# Altium PCB PCB1.PcbDoc
Units mm, origin at the board's own origin, x right, y up, seen from the top; angles counter-clockwise.
Board outline 88.49 x 113.16 mm, 2 copper layers (Top Layer, Bottom Layer); 100 components, 71 nets, 349 pads, 0 vias.
Unrouted connection lines stored in the file: 230.
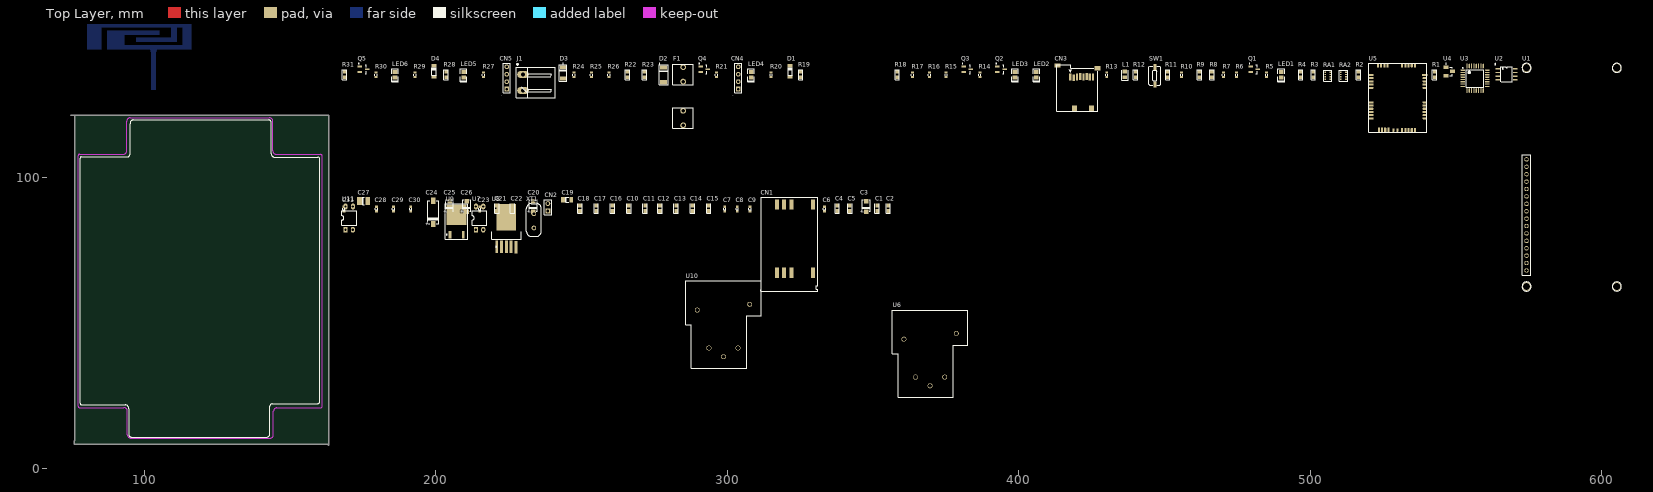
[diagram p0: Top Layer view]
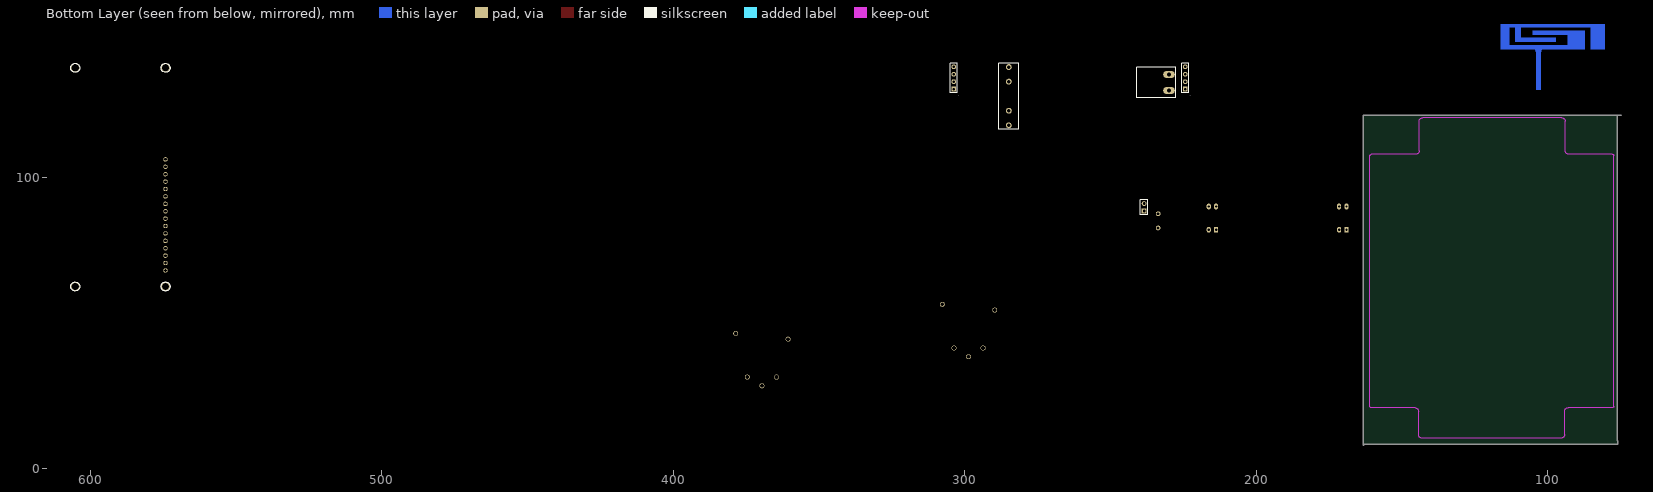
[diagram p1: Bottom Layer view, seen from below]

## Layer stack, top to bottom
Top Layer: signal copper 0.0356
Dielectric: dielectric 0.32, FR-4, Dk 4.8
Bottom Layer: signal copper 0.0356

## Board outline
95.707,121.133 74.803,121.133 76.2,121.133 76.2,10.744 76.2,9.703 76.073,9.576 76.073,8.357 162.916,8.357 163.297,7.976 163.297,17.755 163.297,121.133 95.834,121.133

## Design rules (kind name [scope] priority, off if disabled: settings)
Clearance [All] p1: gap=0.254
PolygonConnect [All] p1: connectstyle=Relief reliefconductorwidth=0.254 reliefentries=4 polygonreliefangle="90 Angle"
RoutingVias [All] p1: holewidth=0.711 width=1.27 viastyle="Through Hole" minholewidth=0.711 minwidth=1.27 maxholewidth=0.711 maxwidth=1.27
SilkscreenOverComponentPads [IsPad] p1: minsilkscreentomaskgap=0.254
SolderMaskExpansion [All] p1: expansion=0.102
Width "Schematic Width Constraint_1" [InNet('V_OUT')] p1: maxlimit=2.286 minlimit=2.032 preferedwidth=2.286
Width "Schematic Width Constraint" [InNet('RL_NO0')] p2: maxlimit=2.286 minlimit=2.032 preferedwidth=2.286
Width [All] p3: maxlimit=0.762 minlimit=0.254 preferedwidth=0.254
27 further rules are at their usual default settings.

## Components (designator, comment, footprint, x,y, rotation, side; value= is the part's Value field where it differs from the comment)
C1 "10p" C2012-0805 351.46,89.281 r90 top
C2 "33p" C2012-0805 355.27,89.281 r90 top
C3 "10uF" "Cap SMD Tant 10u" 347.675,89.865 r90 top
C4 "10p" C2012-0805 337.795,89.281 r90 top
C5 "33p" C2012-0805 342.113,89.281 r90 top
C6 "104" C1608-0603 333.375,89.052 r90 top
C7 "33pF" C1608-0603 299.187,89.052 r90 top
C8 "33pF" C1608-0603 303.505,89.052 r90 top
C9 "33pF" C1608-0603 307.848,89.052 r90 top
C10 "104" C2012-0805 266.268,89.281 r90 top
C11 "104" C2012-0805 271.856,89.281 r90 top
C12 "104" C2012-0805 276.936,89.281 r90 top
C13 "104" C2012-0805 282.524,89.281 r90 top
C14 "104" C2012-0805 288.112,89.281 r90 top
C15 "104" C2012-0805 293.7,89.281 r90 top
C16 "22P" C2012-0805 260.68,89.281 r90 top
C17 "22P" C2012-0805 255.092,89.281 r90 top
C18 "104" C2012-0805 249.504,89.281 r90 top
C19 "2.2uF" C1206 243.713,92.227 r0 top
C20 "10uF" "Cap SMD Tant 10u" 233.477,89.865 r90 top
C21 "104" C2012-0805 221.056,89.281 r90 top
C22 "104" C2012-0805 226.39,89.281 r90 top
C23 "104" C1608-0603 215.113,89.052 r90 top
C24 "10uF" "Cap SMD Tant - 470u" 199.111,87.884 r90 top
C25 "10uF" "Cap SMD Tant 10u" 204.775,89.865 r90 top
C26 "10uF" "Cap SMD Tant 10u" 210.617,89.865 r90 top
C27 "104" C1210 173.888,91.77 r0 top
C28 "104" C1608-0603 179.73,89.052 r90 top
C29 "104" C1608-0603 185.572,89.052 r90 top
C30 "104" C1608-0603 191.44,89.052 r90 top
C31 "104" C1608-0603 168.504,89.052 r90 top
CN1 "Sim Card Holder" "Sim card holder 1" 317.043,90.576 r90 top
CN2 "HDR1x2" CON.HDR1X2 238.531,88.367 r90 top
CN3 "SD Card/MMC" mini_SDCard 418.948,134.264 r0 top
CN4 "HDR1x4" CON.HDR1X4 303.809,130.175 r90 top
CN5 "HDR1x4" CON.HDR1X4 224.409,130.175 r90 top
D1 "1N4148" SOD80 321.615,136.246 r90 top
D2 "1N4007" DO-214AA,SMB 278.206,132.563 r90 top
D3 "Zener" D1208 243.688,133.833 r90 top
D4 "1N4148" SOD80 199.441,136.246 r90 top
F1 "FUSE" "Fuse 1" 284.912,117.729 r90 top
J1 "Domino2" "Domino 2 - Thao roi" 229.972,129.692 r0 top
L1 "100uH" L2012-0805 436.474,135.204 r90 top
LED1 "LED" LED.SMD0805 490.093,135.103 r90 top
LED2 "LED" LED.SMD0805 406.121,135.103 r90 top
LED3 "LED" LED.SMD0805 398.755,135.103 r90 top
LED4 "LED" LED.SMD0805 308.229,135.103 r90 top
LED5 "LED" LED.SMD0805 209.601,135.103 r90 top
LED6 "LED" LED.SMD0805 186.055,135.103 r90 top
Q1 "C1815" "SOT23 [C1815]" 481.101,137.008 r0 top
Q2 "C1815" "SOT23 [C1815]" 394.259,137.008 r0 top
Q3 "C1815" "SOT23 [C1815]" 382.702,137.008 r0 top
Q4 "C1815" "SOT23 [C1815]" 292.379,137.008 r0 top
Q5 "C1815" "SOT23 [C1815]" 175.539,137.008 r0 top
R1 "Value" R2012-0805 542.722,135.153 r90 top
R2 "Value" R2012-0805 516.611,135.153 r90 top
R3 "Value" R2012-0805 501.117,135.153 r90 top
R4 "Value" R2012-0805 496.799,135.153 r90 top
R5 "1k" R1608-0603 485.115,135.077 r90 top
R6 "1k" R1608-0603 474.828,135.077 r90 top
R7 "10k" R1608-0603 470.332,135.077 r90 top
R8 "0" R2012-0805 466.369,135.153 r90 top
R9 "10k" R2012-0805 462.051,135.153 r90 top
R10 "1k" R1608-0603 455.955,135.077 r90 top
R11 "1k" R2012-0805 451.206,135.153 r90 top
R12 "100k" R2012-0805 440.157,135.153 r90 top
R13 "1k" R1608-0603 430.251,135.077 r90 top
R14 "1k" R1608-0603 386.715,135.077 r90 top
R15 "1k" R1608-0603 375.158,135.077 r90 top
R16 "1k" R1608-0603 369.418,135.077 r90 top
R17 "1k" R1608-0603 363.652,135.077 r90 top
R18 "1k" R2012-0805 358.394,135.153 r90 top
R19 "1k" R2012-0805 325.272,135.153 r90 top
R20 "10k" R1608-0603 315.112,135.077 r90 top
R21 "10k" R1608-0603 296.393,135.077 r90 top
R22 "220" R2012-0805 265.811,135.153 r90 top
R23 "1k" R2012-0805 271.653,135.153 r90 top
R24 "120k" R1608-0603 247.447,135.077 r90 top
R25 "1k" R1608-0603 253.441,135.077 r90 top
R26 "1k" R1608-0603 259.461,135.077 r90 top
R27 "51K" R1608-0603 216.459,135.077 r90 top
R28 "1k" R2012-0805 203.606,135.153 r90 top
R29 "10k" R1608-0603 192.913,135.077 r90 top
R30 "10k" R1608-0603 179.553,135.077 r90 top
R31 "220" R2012-0805 168.758,135.153 r90 top
RA1 "10,100,1K,10K" Res_Array_Chip 506.959,133.553 r90 top
RA2 "10,100,1K,10K" Res_Array_Chip 512.318,133.553 r90 top
SW1 "PTS635" TactSwitches.PTS635.SMT 446.735,134.798 r90 top
U1 "LCD.LCD16x2" "LCD connector" 574.269,67.945 r90 top
U2 "24C04" SOIC8 564.413,137.135 r0 top
U3 "STM32F030K6T6" QFP80P900X900X245-32N 556.616,133.883 r0 top
U4 "ANTEN" SOT150P320X110-3N 547.751,136.246 r0 top
U5 "M95" QFN50P400X400X80_HS-15N 520.141,115.418 r0 top
U6 "RELAY_OMRON_4PIN" PCBComponent_1 356.641,24.359 r0 top
U7 "PC817" DIP4 213.792,81.89 r90 top
U8 "MIC29302" DPAK165P1524X238-5N 218.948,73.736 r0 top
U9 "LM1117-3.3V" TO-252 207.162,80.061 r0 top
U10 "RELAY_OMRON_4PIN" PCBComponent_1 285.75,34.341 r0 top
U11 "PC817" DIP4 169.062,81.89 r90 top
XT1 "8MHz" Crystal.HC49/USxx 233.705,87.401 r0 top

## Footprints (in the part's own frame and the unit in brackets; to place one, negate y for a bottom-side part, rotate by r counter-clockwise, add the part's x,y. Pads: shape width x height; smd on the part's side, far side on the other; paste and mask are expansions set on the pad)
C1206 [mm] "Chip Capacitor; Body 3.2 x 1.6 mm (LxW typ)"
  rect 1.27x1.8 smd: 1(0,0) 2(2.8,0)
  silkscreen extent 0.87,-0.81 1.9,0.8
C1210 [mm] "Chip Capacitor; Body 3.2 x 2.5 mm (LxW typ)"
  rect 1.6x2.7 smd: 1(0,0) 2(2.8,0)
  silkscreen extent 1.1,-1.25 1.7,1.25
C1608-0603 [mil] "Capacitor Chip 0603 package"
  rect 30x38 smd: 1(-30,0.06) 2(30,0.06)
  silkscreen extent -11,-15 10,15, body extent -28,-17 28,17, height 32
C2012-0805 [mm] "Capacitor Chip 0805 package"
  rect 1.3x1.27 smd: 1(-0.945,-0.007) 2(0.955,-0.007)
  silkscreen extent -1.7,-0.76 1.51,0.75, body extent -0.89,-0.58 0.89,0.58, height 0.79
"Cap SMD Tant 10u" [mm] "CAP TANT 10UF 16V 10% 1210"
  rect 1.5x1.55 smd: 1(-1.8,0) 2(1.8,0)
  silkscreen extent -1.7,-1.4 2.3,1.37, body extent -2.4,-0.91 2.4,0.89, height 1.8
"Cap SMD Tant - 470u" [mm] "CAP TANT 10UF 50V 10% 2917"
  rect 2.2x1.55 smd: 1(-4,0) 2(4,0)
  silkscreen extent -3.91,-1.93 3.96,1.91, body extent -3.76,-1.78 3.84,1.73, height 2.79
CON.HDR1X2 [mil]
  rect 64x64 hole 35.43: 1(-0.44,0.28)
  round 64 hole 35.43: 2(99.56,0.28)
  silkscreen extent -51,-50 150,50, body extent -51,-50 149,50, height 350
CON.HDR1X4 [mil]
  rect 64x64 hole 35.43: 1(0,0)
  round 64 hole 35.43: 2(100,0) 3(200,0) 4(300,0)
  silkscreen extent -50,-50 350,50, body extent -50,-50 350,50, height 350
Crystal.HC49/USxx [mm] "HC49USxx package"
  rrect100% 1.6x1.6 hole 1: 1(0,0) 2(0,-4.877)
  silkscreen extent -2.55,-7.8 2.55,3.5, body extent -2.29,-7.57 2.3,3.25, height 5.08
D1208 [mil]
  rect 50x80 smd: 1(0,0) 2(150,0)
  silkscreen extent -35,-50 205,50
DIP4 [mm]
  rect 2x1.4 hole 0.8: 1(0,0)
  oval 2x1.4 hole 0.8: 2(0,-2.54) 3(8,-2.54) 4(8,0)
  silkscreen extent 1.48,-3.78 6.57,1.3, body extent -0.17,-3.72 8.19,1.34, height 5.4
DO-214AA,SMB [mm]
  rect 1.5x2.3 smd: 1(0,0) 2(5,0)
  silkscreen extent -0.95,-1.6 6.48,1.57, body extent -0.19,-1.78 5.21,1.82, height 2.3
"Domino 2 - Thao roi" [mm]
  oval 4x2.5 hole 1.5: 1(0,5.5) 2(0,0)
  silkscreen extent -2.25,-2.5 11.03,9.2, body extent -1.09,-2.54 11.07,8, height 9
DPAK165P1524X238-5N [mm] "D2-PAK, 5-Pads, Body 8.43x8.39mm (max), IPC Medium Density"
  rect 1x4.2 smd: 1(2,2.336) 2(3.65,2.336) 3(5.3,2.336) 4(6.95,2.336) 5(8.6,2.209)
  rect 6.7x9.1 smd: 3(5.334,12.436)
  silkscreen extent 0.28,2.21 10.38,7.49, body extent 0.31,4.24 10.36,14.91, height 2.38
"Fuse 1" [mm]
  round 2 hole 1.2: 1(0,0) 1(5,0) 2(15,0) 2(20,0)
  silkscreen extent -1,-3.52 21,3.52, body extent -0.03,-2.58 20.03,2.58, height 8
L2012-0805 [mm] "Inductor Chip 0805 package"
  rect 1.3x1.5 smd: 1(-0.945,-0.007) 2(0.955,-0.007)
  silkscreen extent -1.99,-1.16 1.51,1.14, body extent -0.89,-0.58 0.89,0.58, height 0.79
"LCD connector" [mm] "Character LCD 16x2"
  round 1.5 hole 0.9: 1(0,0) 2(2.54,0) 3(5.08,0) 4(7.62,0) 5(10.16,0) 6(12.7,0) 7(15.24,0) 8(17.78,0) 9(20.32,0) 10(22.86,0) 11(25.4,0) 12(27.94,0) 13(30.48,0) 14(33.02,0) 15(35.56,0) 16(38.1,0)
  round 3 hole 2.5 unplated: M1(-5.5,0) M2(69.5,0) M3(-5.5,-31) M4(69.5,-31)
  silkscreen extent -7.09,-32.57 71.07,1.57, body extent -1.27,-1.32 39.37,1.22, height 5.5
LED.SMD0805 [mm]
  rect 1.3x1.6 smd: 1(0.948,0.006) 2(-0.952,0.006)
  silkscreen extent -2.44,-1.14 2,1.16, body extent -1.08,-0.64 1.08,0.64, height 1.14
mini_SDCard [mm]
  rect 0.8x2.4 smd paste+0.127 mask+0.127: 1(-1.21,0) 3(1.1,0) 4(2.2,0.2) 5(3.3,0) 6(4.4,0.2) 7(5.5,0) 8(6.6,0)
  rect 0.8x2.2 smd paste+0.127 mask+0.127: 2(0,-0.2)
  rect 2x1.4 smd paste+0.127 mask+0.127: 9(8.128,3.048) 10(-5.588,4.064)
  rect 1.8x2 smd paste+0.127 mask+0.127: 11(0.254,-10.668) 12(6.096,-10.668)
  silkscreen extent -5.84,-11.68 8.13,4.32, body extent -5.84,-11.63 8.01,4.52, height 1.68
PCBComponent_1 [mm]
  round 1.7 hole 1.3: 1(4,20) 2(18,7) 3(8,7) 4(22,22) 5(13,4)
  silkscreen extent 0,0 26,30
QFN50P400X400X80_HS-15N [mm] "QFN, 14-Leads, Body 4.00x4.00mm, Pitch 0.50mm, Thermal Pad 4.00x2.20mm, IPC Medium Density"
  rrect50% 1.8x0.7 smd: 1(0.7,19.6) 2(0.7,18.5) 3(0.7,17.4) 4(0.7,16.3) 5(0.7,15.2) 6(0.7,10.2) 7(0.7,9.1) 8(0.7,8) 9(0.7,6.9) 10(0.7,5.8) 11(0.7,4.7) 31(19.2,19.6)
  rrect50% 0.7x1.8 smd: 12(3.45,0.7) 13(4.55,0.7) 14(5.65,0.7) 15(6.75,0.7)
  rrect50% 0.7x1.4 smd: 16(11.45,0.7) 17(12.55,0.7) 18(13.65,0.7) 19(14.75,0.7) 20(15.85,0.7) 32(15.85,22.9) 33(14.75,22.9) 34(13.65,22.9) 35(12.55,22.9) 36(11.45,22.9) 37(6.45,22.9) 38(5.35,22.9) 39(4.25,22.9) 40(3.15,22.9)
  rrect50% 1.4x0.7 smd: 21(19.2,4.7) 22(19.2,5.8) 24(19.2,8) 25(19.2,9.1) 26(19.2,10.2) 27(19.2,15.2) 28(19.2,16.3) 29(19.2,17.4) 30(19.2,18.5) 223(19.2,6.9)
  rrect50% 0.7x1.2 smd: 41(8.45,0.7) 42(9.8,0.7)
  silkscreen extent 0,0 19.9,23.6
QFP80P900X900X245-32N [mm] "QFP, 32-Leads, Body 7.00x7.00mm, Pitch 0.80mm, IPC Medium Density"
  oval 1.6x0.45 smd: 1(-4.2,2.8) 2(-4.2,2) 3(-4.2,1.2) 4(-4.2,0.4) 5(-4.2,-0.4) 6(-4.2,-1.2) 7(-4.2,-2) 8(-4.2,-2.8) 17(4.2,-2.8) 18(4.2,-2) 19(4.2,-1.2) 20(4.2,-0.4) 21(4.2,0.4) 22(4.2,1.2) 23(4.2,2) 24(4.2,2.8)
  oval 0.45x1.6 smd: 9(-2.8,-4.2) 10(-2,-4.2) 11(-1.2,-4.2) 12(-0.4,-4.2) 13(0.4,-4.2) 14(1.2,-4.2) 15(2,-4.2) 16(2.8,-4.2) 25(2.8,4.2) 26(2,4.2) 27(1.2,4.2) 28(0.4,4.2) 29(-0.4,4.2) 30(-1.2,4.2) 31(-2,4.2) 32(-2.8,4.2)
  silkscreen extent -4.32,-3 3,3.7, body extent -3.5,-3.5 3.5,3.5, height 2.45
R1608-0603 [mil] "Resister Chip 0603 package"
  rect 30x39.37 smd: 1(-30,0.06) 2(30,0.06)
  silkscreen extent -11,-15 10,16, body extent -28,-17 28,17, height 12
R2012-0805 [mm] "Resister Chip 0805 package"
  rect 1.3x1.27 smd: 1(-0.945,-0.007) 2(0.955,-0.007)
  silkscreen extent -1.72,-0.73 1.73,0.75, body extent -0.89,-0.58 0.89,0.58, height 0.41
Res_Array_Chip [mil] "Res Array Chip 4xRes"
  rect 18x24 smd: 1(-2,0) 2(31.5,0) 3(62.99,0) 4(96,0) 5(96,70) 6(62.99,70) 7(31.5,70) 8(-2,70)
  silkscreen extent -26,-22 120,92, body extent -16,3 110,65, height 20
"Sim card holder 1" [mm]
  rect 3.5x1.4 smd: 1(0,0) 2(0,-2.54) 3(0,-5.08) 4(0,-12.4) 5(-23.4,0) 6(-23.4,-2.54) 7(-23.4,-5.08) 8(-23.4,-12.4)
  silkscreen extent -29.72,-14.07 2.54,5.59, body extent -28.21,-12.45 1.79,4.85, height 2.5
SOD80 [mm] "4148-SOD80 Diode, 2-Leads, Body 3.4x1.4mm, IPC Medium Density"
  rect 1.2x1.65 smd: 1(-1.905,0) 2(1.905,0)
  silkscreen extent -1.33,-0.76 1.27,0.72, body extent -2,-0.9 2,0.9, height 1.89
SOIC8 [mm]
  rect 1.5x0.5 smd: 1(0,0) 2(0,-1.27) 3(0,-2.54) 4(0,-3.81) 5(6,-3.81) 6(6,-2.54) 7(6,-1.27) 8(6,0)
  silkscreen extent -1.05,-4.5 4.9,1.82, body extent -0.08,-4.39 5.92,0.51, height 1.7
"SOT23 [C1815]" [mm] "SOT23, 3-Leads, Body 3.0x2.6mm (max), Pitch 0.95mm, IPC Medium Density"
  rect 1.55x0.6 smd: 1(-1.5,0.95) 2(-1.5,-0.95) 3(0.925,0)
  silkscreen extent -2.05,-1.5 0.7,2.02, body extent -1.53,-1.5 1.53,1.5, height 1.1
SOT150P320X110-3N [mm] "SOT23, 3-Leads, Body 3.00x3.20mm, Pitch 1.50mm, IPC Medium Density"
  rect 1.85x1.2 smd: 1(1.125,0) 2(-1.125,1.5) 3(-1.125,-1.5)
  silkscreen extent -1.25,-1.5 0.96,2.77, body extent -0.95,-1.5 0.96,1.5, height 1.1
TactSwitches.PTS635.SMT [mil] "3,5 mm Tact Switches, PTS635 Series"
  rect 79x39 smd: 1(-118,0) 2(118,0)
  silkscreen extent -128,-79 128,79, body extent -135,-70 135,70, height 100
TO-252 [mm]
  rect 1x2.54 smd: 1(-2.3,0.152) 3(2.3,0.152)
  rect 7x7 smd: 2(0,7)
  silkscreen extent -3.81,-1.4 3.81,10.79, body extent -3.24,-0.27 3.3,9.67, height 2.44

## Part data
C1 C2 C4 C5 C6 C7 C8 C9 C10 C11 C12 C13 C14 C15 C16 C17 C18 C19 C21 C22 C23 C27 C28 C29 C30 C31: library part Capacitor, "Cap, Ceramic Capacitor, 104, 10V"
C3 C20 C24 C25 C26: library part Cap_Pol, "Cap, Polizared Capacitor 10uF,16V"
CN2: "Conn, Header 1x2"
CN3: "MMC/SD Card"
CN4 CN5: "Conn, Header 1x4"
D1 D4: library part "Diode 1N4148", "Diode, Small signal 1N4148"
D2: library part "Diode 1N4007", "Diode, General Purpose Rectifier, 1Amp,1000V 1N4007"
D3: library part "Diode Zener", "Diode, Zener"
J1: "Conn, 2 pins Domino Header"
L1: library part Inductor, "Ind, 100uH, 20%"
LED1 LED2 LED3 LED4 LED5 LED6: "Led, Red, SMD0805"
Q1 Q2 Q3 Q4 Q5: "BJT, Audio Freq Amplifier NPN Transistor C1815"
R1 R2 R3 R4 R5 R6 R7 R8 R9 R10 R11 R13 R14 R15 R16 R17 R18 R19 R20 R21 R22 R23 R24 R25 R26 R27 R28 R29 R30 R31: library part Resistor, "Res, 1K,1/10W, 0805, 10%"
R12: library part Resistor, "Resistor"
RA1 RA2: library part "Resister Array Chip 4xR", "Res Array Chip,10%"
SW1: library part "SW TACT MOM SPST", "SWITCH, TACT MOM SPST SMD"
U1: "LCD, 2 line 16 charactors"
U2: library part 24LC04, "IC, 2-wire Serial EEPROM 512K 24C04"
U3 U4 U5 U6 U8 U10: library part Component_1
U7 U11: "Opto, High Density Opto-Coupler PC817"
U9: library part LM1117MP-3.3TR, "IC, 3.3V 800mA Low-Dropout Linear Regulator LM1117-3.3V"
XT1: library part "Xtal 2", "Osc, 4Mhz Crystal"

## Nets (pads, with @x,y where several pads share a name; then routed paths per layer and width w, separated by ;. In a path a pad name is that pad's centre, name@x,y a point inside that pad or via, vN(x,y) a via of type N, cw(c..) or ccw(c..) an arc to the next point about the centre after c; other vN are vias at no path point)
3V3: CN3.3 RA1.1 RA1.2 RA1.3 RA1.4 RA2.1 RA2.2 RA2.3 RA2.4 U7.1 U11.1
4V3: C24.1 C29.1 CN2.1 D3.2 R1.1 R24.1 R25.1 U1.2 U1.15 U2.8 U8.4 U9.3
DATA1: CN4.3 R18.2 U3.29
DATA2: CN5.3 R23.2 U3.28
GND: C1.1 C2.1 C7.2 C8.2 C9.2 C10.2 C11.2 C12.2 C13.2 C14.2 C15.2 C16.2 C17.2 C18.1 C19.2 C20.2 C21.1 C22.2 C23.2 C24.2 C25.2 C26.2 C27.2 C28.2 C29.2 C30.2 C31.2 CN3.6 CN3.11 CN4.1 CN5.1 D3.1 J1.2 LED5.2 Q1.2 Q2.2 Q3.2 Q4.2 Q5.2 R2.2 R3.2 R6.1 R7.2 R16.1 R17.2 R25.2 R27.2 SW1.2 U1.1 U1.7 U1.8 U1.9 U1.10 U2.1 U2.2 U2.3 U2.4 U2.7 U3.16 U3.32 U4.2 U4.3 U5.35 U5.36 U5.37 U5.38 U5.40 U7.3 U8.3 U9.1 U11.3 XT1.1 XT1.2
GSM_PW: R5.1
"LCD DATA0": RA2.8 U1.11 U3.15
"LCD DATA1": RA2.7 U1.12 U3.14
"LCD DATA2": RA2.6 U1.13 U3.25
"LCD DATA3": RA2.5 U1.14 U3.22
LCD_E: RA1.5 U1.6 U3.21
LCD_R/W: RA1.6 U1.5 U3.6
LCD_RS: RA1.7 U1.4 U3.7
MCU_RX: U3.9 U5.22
MCU_TX: U3.8 U5.21
NetC1_2: C1.2 C2.2 C4.1 C5.1
NetC4_2: C4.2 C5.2 U4.1 U5.39
NetC16_1: C16.1 U3.3
NetC17_1: C17.1 U3.2
NetC18_2: C18.2 SW1.1 U3.4
NetC19_1: C19.1 U5.19
NetD1_1: D1.1 LED4.2 Q4.3 U6.3
NetD2_1: D2.1 F1.2
NetD4_1: D4.1 LED6.2 Q5.3 U10.3
NetL1_1: L1.1 U3.5
NetLED1_1: LED1.1 R4.2
NetLED2_1: LED2.1 R10.2
NetLED2_2: LED2.2 Q2.3
NetLED4_1: LED4.1 R19.2
NetLED5_1: LED5.1 R26.2
NetLED6_1: LED6.1 R28.2
NetQ1_1: Q1.1 R5.2 R6.2
NetQ2_1: Q2.1 R14.1 R16.2
NetQ3_1: Q3.1 R15.2 R17.1
NetQ4_1: Q4.1 R21.1
NetQ5_1: Q5.1 R30.1
NetR1_2: R1.2 R3.1 U1.3
NetR2_1: R2.1 U1.16
NetR7_1: R7.1 U3.31
NetR14_2: R14.2 U5.12
NetR15_1: R15.1 U5.13
NetR20_1: R20.1 R21.2 U7.4
NetR22_2: R22.2 U7.2
NetR24_2: R24.2 R27.1 U8.5
NetR29_1: R29.1 R30.2 U11.4
NetR31_2: R31.2 U11.2
OUT1: R22.1 U3.26
OUT2: R31.1 U3.27
PWRKEY: Q1.3 U5.10
RL_NO0: U6.5 U10.5
SCL: U2.6 U3.20
SD_CK: CN3.5 U3.11
SD_DT: R11.1 U3.18
SD_MISO: CN3.7 R8.2
SD_MOSI: CN3.2 U3.13
SD_WP: CN3.10 R9.2 R11.2
SDA: U2.5 U3.19
SIM_CLK: C8.1 CN1.3 U5.30
SIM_DATA: C7.1 CN1.7 U5.29
SIM_GND: C3.2 C6.1 CN1.4 CN1.5 CN1.8 U5.31
SIM_RST: C9.1 CN1.2 U5.28
SIM_VCC: C3.1 C6.2 CN1.1 U5.27
SPI1_MISO: R8.1 U3.12
SPI1_NSS: CN3.1 R12.2 U3.10
SWCLK: U3.24
SWDIO: U3.23
SYS: LED1.2 U3.30
V_OUT: U6.4 U10.4
VCC: C20.1 C21.2 C22.1 C23.1 C25.1 C26.1 C30.1 C31.1 CN4.4 CN5.4 L1.2 R4.1 R9.1 R12.1 R18.1 R23.1 R26.1 U3.1 U3.17 U9.2
VGSM: C10.1 C11.1 C12.1 C13.1 C14.1 C15.1 CN2.2 R10.1 R13.1 U5.33 U5.34
VPP: C27.1 C28.1 D1.2 D2.2 D4.2 R19.1 R20.2 R28.1 R29.2 U6.2 U8.1 U8.2 U10.2
pads on no net: CN1.6 CN3.4 CN3.8 CN3.9 CN3.12 CN4.2 CN5.2 F1.1 J1.1 LED3.1 LED3.2 Q3.3 R13.2 RA1.8 U1.M1 U1.M2 U1.M3 U1.M4 U5.1 U5.2 U5.3 U5.4 U5.5 U5.6 U5.7 U5.8 U5.9 U5.11 U5.14 U5.15 U5.16 U5.17 U5.18 U5.20 U5.24 U5.25 U5.26 U5.32 U5.41 U5.42 U5.223 U6.1 U10.1

## Keep-outs
Keep-Out Layer:
  lines w0.254: 160.603,107.73 145.415,107.73 cw(c145.415,109) 144.145,109 144.145,119.083 ccw(c142.875,119.083) 142.875,120.353 95.301,120.353 ccw(c95.301,119.083) 94.031,119.083 94.031,109 cw(c92.86,109) 92.86,107.829 77.86,107.829 ccw(c77.864,107.329) 77.364,107.325 77.364,21.325 ccw(c77.796,21.325) 77.796,20.893 92.984,20.893 cw(c92.984,19.623) 94.254,19.623 94.254,11.623 ccw(c95.524,11.623) 95.524,10.353 143.098,10.353 ccw(c143.098,11.623) 144.368,11.623 144.368,19.623 cw(c145.539,19.623) 145.539,20.794 160.539,20.794 ccw(c160.535,21.294) 161.035,21.298 ; 160.606,107.73 cw(c160.606,107.298) 161.039,107.298 ; 161.025,21.361 161.025,107.275

## Other copper
Bottom Layer:
  rectangle: 87.259,148.717 105.259,150.217
  rectangle: 87.259,143.788 93.259,148.788
  rectangle: 93.233,143.789 113.335,145.289
  rectangle: 113.227,143.797 116.227,153.797
  rectangle: 97.227,146.297 111.227,147.797
  rectangle: 109.227,147.797 111.227,153.797
  rectangle: 80.319,143.797 85.319,153.797
  rectangle: 85.319,151.297 109.319,153.797
  rectangle: 111.227,151.297 113.227,153.797
  region: 101.972,144.013 102.194,143.261 102.448,142.499 102.438,129.87 103.962,129.87 103.962,138.938 103.988,142.621 104.512,144.013

## Silkscreen, mask and mechanical layers (free items; w line width, h text height)
Top Overlay:
  lines w0.254: 78.456,106.933 ccw(c78.456,106.506) 78.029,106.502 78.029,105.308 78.029,22.352 ccw(c78.562,22.352) 78.562,21.819 ; 78.461,106.934 94.213,106.934 ccw(c94.213,107.888) 95.167,107.888 95.167,118.251 cw(c96.433,118.367) 96.317,119.634 142.762,119.634 ; 78.676,21.819 93.467,21.819 cw(c93.467,20.549) 94.737,20.549 94.742,11.635 ccw(c95.606,11.635) 95.606,10.771 95.96,10.771 141.987,10.771 ccw(c141.987,11.939) 143.156,11.939 143.156,21.413 cw(c143.943,21.413) 143.943,22.201 159.436,22.201 ; 142.686,119.63 cw(c142.686,118.72) 143.596,118.72 143.596,107.902 ccw(c144.653,107.902) 144.653,106.845 159.55,106.845 cw(c159.55,106.121) 160.274,106.121 160.274,23.092 cw(c159.39,23.085) 159.396,22.201

## Dimensions
168.504,95.148 to 169.062,59.868 on Top Overlay
178.968,92.177 to 177.089,62.814 on Top Overlay

## Text inside footprints (layer, text, board x,y; h text height)
C3: Top Overlay "+" at 346.507,87.528 h1 r90
C20: Top Overlay "+" at 232.308,87.528 h1 r90
C24: Top Overlay "+" at 197.46,83.363 h1 r90
C25: Top Overlay "+" at 203.606,87.528 h1 r90
C26: Top Overlay "+" at 209.448,87.528 h1 r90